# EAGLE board PrototypeVar3(SplittedOntoSections) (EAGLE 7.4.0)
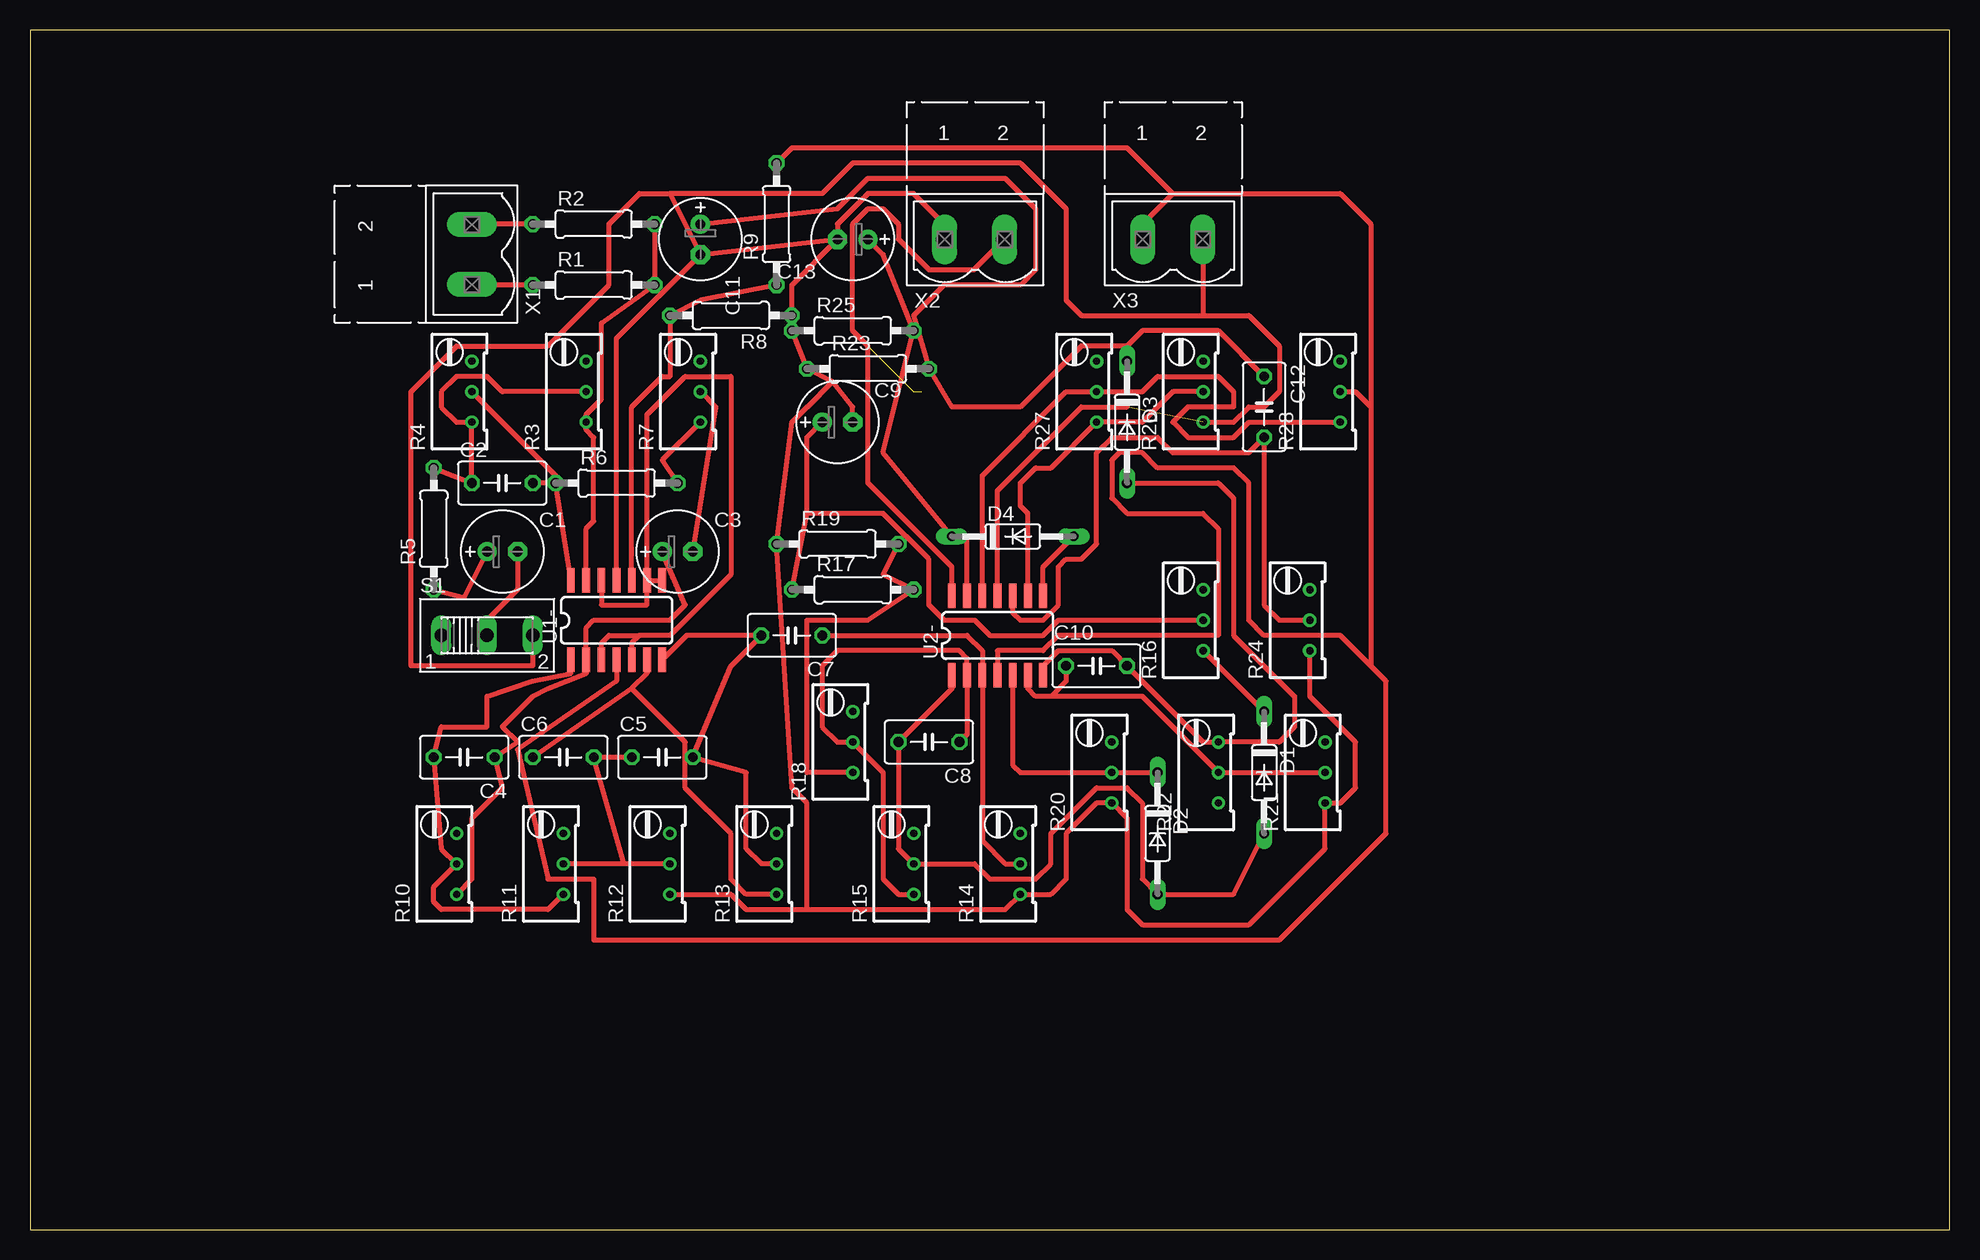
[diagram p0: board, top side]

Size 160 x 100 mm. Coordinates in mm from the lower left corner, seen from the top.
Outline: 0,0 160,0 160,100 0,100 0,0
Copper layers (1*16): Top 0.035mm / dielectric 1.5mm / Bottom 0.035mm
Design rules "default": minimum track width 10mil, minimum drill 24mil, track to track 8mil, track to pad 8mil, pad to pad 8mil, via to via 8mil, smd to smd 8mil, copper to edge 40mil, drill to drill 8mil, minimum pad ring 10mil, minimum via ring 8mil, stop-mask expansion 4mil, vias tented up to drill 0mil, thermal gap 10mil

## Footprints (pad centres in the part's own frame; a part is rotated, then mirrored left to right if it is on the bottom)
E2,5-7 = drill 0.813 pad 1.6: + -1.27,0 | drill 0.813 pad 1.6 octagon: - 1.27,0
C050-035X075 = drill 0.813 octagon: 1 -2.54,0; 2 2.54,0
DO35-10 = drill 0.813 long: A 5.08,0; C -5.08,0
0207/10 = drill 0.813 octagon: 1 -5.08,0; 2 5.08,0
RTRIM64W = drill 0.61: 1 1.27,-2.54; 2 1.27,0; 3 1.27,2.54
255SB = drill 1.118 long: 1 -3.81,0; 2 0,0; 3 3.81,0
SOIC-14 = smd 0.66 x 2.032: 1 -4.445,-3.315; 2 -3.175,-3.315; 3 -1.905,-3.315; 4 -0.635,-3.315; 5 0.635,-3.315; 6 1.905,-3.315; 7 3.175,-3.315; 8 3.175,3.315; 9 1.905,3.315; 10 0.635,3.315; 11 -0.635,3.315; 12 -1.905,3.315; 13 -3.175,3.315; 14 -4.445,3.315
MSTBV2 = drill 1.397 long: 1 -2.5,0; 2 2.5,0

## Placement (x,y rotation side)
C1  47/10  [E2,5-7]  39.37,56.52 0 top
C2  682  [C050-035X075]  39.37,62.23 0 top
C3  4.7/25  [E2,5-7]  53.98,56.52 0 top
C4  332  [C050-035X075]  36.2,39.37 180 top
C5  104  [C050-035X075]  52.7,39.37 0 top
C6  104  [C050-035X075]  44.45,39.37 0 top
C7  104  [C050-035X075]  63.5,49.53 180 top
C8  181  [C050-035X075]  74.93,40.64 180 top
C9  47/6.3  [E2,5-7]  67.31,67.31 0 top
C10  471  [C050-035X075]  88.9,46.99 0 top
C11  4.7/10  [E2,5-7]  55.88,82.55 270 top
C12  104  [C050-035X075]  102.87,68.58 270 top
C13  2.2/16  [E2,5-7]  68.58,82.55 180 top
D1  1N4148  [DO35-10]  102.87,38.1 270 top
D2  1N4148  [DO35-10]  93.98,33.02 270 top
D3  1N4148  [DO35-10]  91.44,67.31 270 top
D4  1N4148  [DO35-10]  81.92,57.78 0 top
R1  3M3  [0207/10]  46.99,78.74 0 top
R2  3M3  [0207/10]  46.99,83.82 0 top
R3  500K  [RTRIM64W]  45.09,69.85 0 top
R4  500K  [RTRIM64W]  35.56,69.85 0 top
R5  240  [0207/10]  33.66,58.42 90 top
R6  100K  [0207/10]  48.9,62.23 0 top
R7  200K  [RTRIM64W]  54.61,69.85 0 top
R8  100K  [0207/10]  58.42,76.2 180 top
R9  100K  [0207/10]  62.23,83.82 90 top
R10  200K  [RTRIM64W]  34.29,30.48 0 top
R11  20K  [RTRIM64W]  43.18,30.48 0 top
R12  5K  [RTRIM64W]  52.07,30.48 0 top
R13  200K  [RTRIM64W]  60.96,30.48 0 top
R14  100K  [RTRIM64W]  81.28,30.48 0 top
R15  1M  [RTRIM64W]  72.39,30.48 0 top
R16  2K  [RTRIM64W]  96.52,50.8 0 top
R17  6.8K  [0207/10]  68.58,53.34 0 top
R18  50K  [RTRIM64W]  67.31,40.64 0 top
R19  22K  [0207/10]  67.31,57.15 0 top
R20  20K  [RTRIM64W]  88.9,38.1 0 top
R21  1M  [RTRIM64W]  106.68,38.1 0 top
R22  2M  [RTRIM64W]  97.79,38.1 0 top
R23  100K  [0207/10]  69.85,71.75 0 top
R24  500K  [RTRIM64W]  105.41,50.8 0 top
R25  100K  [0207/10]  68.58,74.93 0 top
R26  2K  [RTRIM64W]  96.52,69.85 0 top
R27  10K  [RTRIM64W]  87.63,69.85 0 top
R28  10K  [RTRIM64W]  107.95,69.85 0 top
S1  [255SB]  38.1,49.53 0 top
U1-  LM324  [SOIC-14]  49.53,50.8 0 top
U2-  LM324  [SOIC-14]  81.28,49.53 0 top
X1  [MSTBV2]  36.83,81.28 90 top
X2  [MSTBV2]  78.74,82.55 0 top
X3  [MSTBV2]  95.25,82.55 0 top

## Library data of the parts
C1-C13 R1-R28 = resistor
D1-D4 = diode
S1 = switch
U1- U2- = seanvoisen
X1-X3 = con-phoenix-500; OC_FARNELL: unknown; OC_NEWARK: unknown

## Nets
GND: C9.- C11.- C13.- R8.1 R12.1 R14.1 R19.1 R20.1 R21.1 R23.1 R24.1 R25.1 R26.1 S1.3 U1-.11 U2-.11 X2.1 X3.2
N$1: C3.+ C4.1 R10.1 U1-.2
N$2: C4.2 R10.2 R11.1 U1-.1
N$3: C5.1 C6.2 R11.2 R12.2
N$4: C5.2 C7.2 R13.2 U1-.7
N$5: C7.1 R14.2 U2-.3
N$6: C6.1 R13.1 U1-.6
N$7: C8.1 R15.1 R18.2 U2-.2
N$8: D1.C R16.1
N$9: C1.+ R5.1
N$10: C9.+ R16.2 R17.1
N$11: C2.2 R4.2 R6.1 U1-.14
N$12: D2.C R20.2 U2-.5
N$13: C10.1 R21.2 R22.2 U2-.6
N$14: C2.1 R3.2 R4.1 R5.2
N$15: C10.2 D3.A R22.3 U2-.7
N$16: C11.+ C12.1 D3.C R23.2
N$17: C12.2 R24.2 U2-.10
N$18: D4.A U2-.8
N$19: C13.+ D4.C R25.2 U2-.13
N$20: R26.2 R27.1 U2-.9
N$21: R27.2 R28.1 U2-.12
N$22: R1.1 X1.1
N$23: R17.2 R18.1 R19.2
N$24: R8.2 R9.1 U1-.10
N$25: R6.2 R7.1
N$26: C3.- R7.2
N$27: U2-.14 X2.2
N$29: C1.- S1.2
N$30: R1.2 R2.2 R3.1 U1-.13
N$31: R2.1 X1.2
U2-: C8.2 D1.A D2.A R15.2 U2-.1
VCC: R9.2 R28.2 U1-.4 U2-.4 X3.1
VCC/2: U1-.3 U1-.5 U1-.8 U1-.9 U1-.12

## Tracks (layer width: path | path; a pad name or v marks a point on that pad's centre or on a via)
GND  (1 unrouted)
  Top 0.406: R26.1 100.33,67.31 101.6,68.58 102.87,68.58 104.14,69.85 104.14,73.66 101.6,76.2 97.79,76.2 | R12.1 58.42,27.94 59.69,26.67 64.77,26.67 | 64.77,26.67 64.77,35.56 63.5,36.83 R19.1 63.5,67.31 64.77,68.58 64.82,68.58 66.91,70.67 | C13.- 63.5,78.74 R8.1 R25.1 R23.1 66.91,70.67 | C9.- 68.58,68.58 66.91,70.67 | 64.77,26.67 81.28,26.67 R14.1 85.09,27.94 86.36,29.21 86.36,33.02 88.9,35.56 R20.1 91.44,34.29 91.44,26.67 92.71,25.4 101.6,25.4 107.95,31.75 R21.1 109.22,35.56 110.49,36.83 110.49,40.64 106.68,44.45 R24.1 | U2-.11 80.64,61.59 87.63,68.58 91.44,68.58 | S1.3 41.91,46.99 31.75,46.99 31.75,69.85 35.56,73.66 43.18,73.66 48.26,78.74 48.26,83.82 50.8,86.36 53.34,86.36 | 53.34,86.36 C11.- | X2.1 76.24,83.78 73.66,86.36 69.85,86.36 67.31,83.82 C13.- | 97.79,76.2 87.63,76.2 86.36,77.47 86.36,85.09 82.55,88.9 68.58,88.9 66.04,86.36 53.34,86.36 | X3.2 97.75,76.24 97.79,76.2 | C11.- C13.- | U1-.11 48.9,74.3 C11.-
N$1
  Top 0.406: R10.1 36.83,29.21 36.83,34.29 39.37,36.83 C4.1 40.64,40.64 39.37,41.91 41.91,44.45 43.18,45.09 46.35,46.35 U1-.2 46.35,50.16 46.99,50.8 53.34,50.8 54.61,52.07 C3.+
N$2
  Top 0.406: 44.95,47.62 U1-.1 45.09,46.35 41.91,45.72 38.1,44.45 38.1,41.91 34.29,41.91 C4.2 34.29,31.75 R10.2 33.66,28.57 33.66,27.3 34.29,26.67 43.18,26.67 R11.1
N$3
  Top 0.406: C5.1 C6.2 49.53,30.48 | 49.53,30.48 R11.2 | R12.2 49.53,30.48
N$4
  Top 0.406: R13.2 60.96,30.48 59.69,31.75 59.69,38.1 C5.2 58.42,46.99 C7.2 54.75,49.53 U1-.7
N$5
  Top 0.406: C7.1 78.11,49.53 79.38,48.26 U2-.3 79.38,32.38 81.28,30.48 R14.2
N$6
  Top 0.406: U1-.6 51.44,46.35 50.16,45.09 | 50.16,45.09 C6.1 | R13.1 59.69,27.94 58.42,29.21 58.42,33.02 54.61,36.83 54.61,40.64 50.16,45.09
N$7
  Top 0.406: C8.1 78.11,41.27 U2-.2 78.11,47.62 77.47,48.26 67.31,48.26 66.04,46.99 66.04,41.91 67.31,40.64 R18.2 71.12,38.1 71.12,29.21 72.39,27.94 R15.1
N$8
  Top 0.406: R16.1 D1.C
N$9
  Top 0.406: R5.1 36.2,52.7 C1.+
N$10
  Top 0.406: R17.1 64.77,59.69 | 64.77,59.69 64.77,66.04 C9.+ | 64.77,59.69 71.12,59.69 74.93,55.88 74.93,52.07 76.2,50.8 78.74,50.8 80.01,49.53 84.45,49.53 85.72,50.8 R16.2
N$11
  Top 0.406: R4.2 44.45,62.23 | 44.45,62.23 R6.1 U1-.14 | 44.45,62.23 C2.2
N$12
  Top 0.406: U2-.5 81.92,38.73 82.55,38.1 R20.2 D2.C
N$13
  Top 0.406: 85.09,44.45 92.71,44.45 R22.2 R21.2 | 85.09,44.45 83.82,44.45 83.19,45.09 U2-.6 | C10.1 86.36,45.72 85.09,44.45
N$14
  Top 0.406: R5.2 C2.1 R4.1 35.56,67.31 34.29,68.58 34.29,69.85 35.56,71.12 38.1,71.12 39.37,69.85 R3.2
N$15
  Top 0.406: U2-.7 84.59,46.35 84.59,47.13 85.72,48.26 90.17,48.26 C10.2 97.79,40.64 R22.3 104.14,40.64 105.41,41.91 105.41,44.45 100.33,49.53 100.33,60.96 99.06,62.23 D3.A
N$16
  Top 0.406: D3.C 91.44,73.66 | C12.1 99.06,74.93 92.71,74.93 91.44,73.66 | 91.44,73.66 87.63,73.66 82.55,68.58 76.83,68.58 R23.2 73.66,76.2 76.2,78.74 82.55,78.74 83.82,80.01 83.82,85.09 81.28,87.63 69.85,87.63 67.31,85.09 C11.+
N$17
  Top 0.406: U2-.10 81.92,51.44 82.55,50.8 84.45,50.8 85.72,52.07 85.72,55.24 86.36,55.88 87.63,55.88 88.9,57.15 88.9,64.77 90.17,66.04 93.98,66.04 95.25,64.77 101.6,64.77 C12.2 102.87,52.07 104.14,50.8 R24.2
N$18
  Top 0.406: U2-.8 84.45,55.24 D4.A
N$19
  Top 0.406: U2-.13 78.11,57.78 D4.C 71.12,64.77 R25.2 71.12,81.28 C13.+
N$20
  Top 0.406: U2-.9 83.19,59.69 82.55,60.33 82.55,62.23 83.82,63.5 85.09,63.5 R27.1 92.71,67.31 95.25,69.85 R26.2
N$21
  Top 0.406: U2-.12 79.38,62.87 86.36,69.85 R27.2 92.71,69.85 93.98,71.12 99.06,71.12 100.33,69.85 100.33,68.58 96.52,68.58 95.25,67.31 96.52,66.04 100.33,66.04 101.6,67.31 R28.1
N$22
  Top 0.406: X1.1 43.14,78.78 R1.1
N$23
  Top 0.406: R18.1 64.77,38.1 64.77,50.8 69.85,50.8 R17.2 71.12,54.61 R19.2
N$24
  Top 0.406: U1-.10 50.16,68.58 52.7,71.12 53.34,71.12 R8.2 55.88,77.47 R9.1
N$25
  Top 0.406: R7.1 52.7,64.14 R6.2
N$26
  Top 0.406: R7.2 57.15,68.58 C3.-
N$27  (2 unrouted)
  Top 0.406: U2-.14 76.83,55.24 69.85,62.23 69.85,73.66 68.58,74.93 68.58,83.82 69.85,85.09 71.12,85.09 72.39,83.82 72.39,82.55 74.93,80.01 78.7,80.01 X2.2
N$29
  Top 0.406: C1.- 40.64,53.34 38.1,50.8 S1.2
N$30
  Top 0.406: U1-.13 46.35,58.42 46.99,59.05 46.99,66.04 46.35,66.67 R3.1 46.35,67.94 47.62,69.22 47.62,75.56 R1.2 R2.2
N$31
  Top 0.406: R2.1 36.87,83.82 X1.2
U2-
  Top 0.406: U2-.1 76.83,45.09 C8.2 72.39,31.75 R15.2 78.74,30.48 80.01,29.21 83.82,29.21 85.09,30.48 85.09,33.02 88.9,36.83 91.44,36.83 92.71,35.56 92.71,29.21 D2.A 100.33,27.94 D1.A
VCC
  Top 0.406: 111.76,46.99 113.03,45.72 113.03,33.02 104.14,24.13 46.99,24.13 46.99,29.21 43.18,29.21 40.64,40.01 48.9,45.72 U1-.4 | 111.76,46.99 109.22,49.53 102.87,49.53 101.6,50.8 101.6,62.23 100.33,63.5 93.98,63.5 92.71,64.77 90.81,64.77 90.17,64.14 90.17,60.96 91.44,59.69 97.79,59.69 99.06,58.42 99.06,49.53 85.72,49.53 84.45,48.26 80.64,48.26 U2-.4 | R28.2 110.49,69.85 111.76,68.58 | 111.76,68.58 111.76,46.99 | X3.1 92.75,83.86 95.25,86.36 | 95.25,86.36 109.22,86.36 111.76,83.82 111.76,68.58 | R9.2 63.5,90.17 91.44,90.17 95.25,86.36
VCC/2
  Top 0.406: U1-.12 47.62,52.07 51.44,52.07 U1-.9 | U1-.9 U1-.8 | U1-.9 51.44,67.94 54.61,71.12 58.42,71.12 58.42,54.61 53.34,49.53 50.8,49.53 | 50.8,49.53 50.16,48.9 U1-.5 | U1-.3 47.62,48.9 48.26,49.53 50.8,49.53